# EAGLE board vfbga48breakout (EAGLE 4.15)
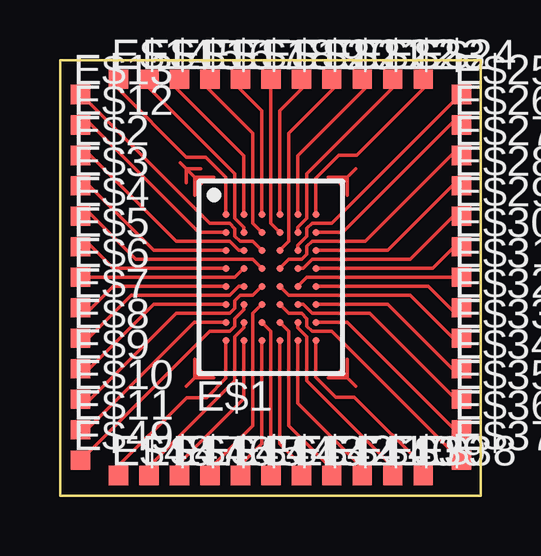
[diagram p0: board, top side]

Size 17.53 x 18.16 mm. Coordinates in mm from the lower left corner, seen from the top.
Outline: 0,0 0,18.16 17.53,18.16 17.53,0 0,0
Copper layers (1*16): Top 0.035mm / dielectric 1.5mm / Bottom 0.035mm
Design rules "default": minimum track width 10mil, minimum drill 24mil, track to track 6mil, track to pad 6mil, pad to pad 6mil, via to via 8mil, smd to smd 6mil, copper to edge 40mil, drill to drill 8mil, minimum pad ring 10mil, minimum via ring 8mil, stop-mask expansion 3mil, vias tented up to drill 0mil, thermal gap 10mil

## Footprints (pad centres in the part's own frame; a part is rotated, then mirrored left to right if it is on the bottom)
VFBGA48-.29 = smd 0.292 x 0.292: A1 -1.875,2.625; A2 -1.125,2.625; A3 -0.375,2.625; A4 0.375,2.625; A5 1.125,2.625; A6 1.875,2.625; B1 -1.875,1.875; B2 -1.125,1.875; B3 -0.375,1.875; B4 0.375,1.875; B5 1.125,1.875; B6 1.875,1.875; C1 -1.875,1.125; C2 -1.125,1.125; C3 -0.375,1.125; C4 0.375,1.125; C5 1.125,1.125; C6 1.875,1.125; D1 -1.875,0.375; D2 -1.125,0.375; D3 -0.375,0.375; D4 0.375,0.375; D5 1.125,0.375; D6 1.875,0.375; E1 -1.875,-0.375; E2 -1.125,-0.375; E3 -0.375,-0.375; E4 0.375,-0.375; E5 1.125,-0.375; E6 1.875,-0.375; F1 -1.875,-1.125; F2 -1.125,-1.125; F3 -0.375,-1.125; F4 0.375,-1.125; F5 1.125,-1.125; F6 1.875,-1.125; G1 -1.875,-1.875; G2 -1.125,-1.875; G3 -0.375,-1.875; G4 0.375,-1.875; G5 1.125,-1.875; G6 1.875,-1.875; H1 -1.875,-2.625; H2 -1.125,-2.625; H3 -0.375,-2.625; H4 0.375,-2.625; H5 1.125,-2.625; H6 1.875,-2.625
TP08SQ = smd 0.8 x 0.8: TP 0,0

## Placement (x,y rotation side)
E$1  [VFBGA48-.29]  8.79,9.11 0 top
E$2  [TP08SQ]  0.85,14.19 0 top
E$3  [TP08SQ]  0.85,12.92 0 top
E$4  [TP08SQ]  0.85,11.65 0 top
E$5  [TP08SQ]  0.85,10.38 0 top
E$6  [TP08SQ]  0.85,9.11 0 top
E$7  [TP08SQ]  0.85,7.84 0 top
E$8  [TP08SQ]  0.85,6.57 0 top
E$9  [TP08SQ]  0.85,5.3 0 top
E$10  [TP08SQ]  0.85,4.03 0 top
E$11  [TP08SQ]  0.85,2.76 0 top
E$12  [TP08SQ]  0.85,15.46 0 top
E$13  [TP08SQ]  0.85,16.73 0 top
E$14  [TP08SQ]  2.44,17.36 0 top
E$15  [TP08SQ]  3.71,17.36 0 top
E$16  [TP08SQ]  4.98,17.36 0 top
E$17  [TP08SQ]  6.25,17.36 0 top
E$18  [TP08SQ]  7.52,17.36 0 top
E$19  [TP08SQ]  8.79,17.36 0 top
E$20  [TP08SQ]  10.06,17.36 0 top
E$21  [TP08SQ]  11.33,17.36 0 top
E$22  [TP08SQ]  12.6,17.36 0 top
E$23  [TP08SQ]  13.87,17.36 0 top
E$24  [TP08SQ]  15.14,17.36 0 top
E$25  [TP08SQ]  16.73,16.73 0 top
E$26  [TP08SQ]  16.73,15.46 0 top
E$27  [TP08SQ]  16.73,14.19 0 top
E$28  [TP08SQ]  16.73,12.92 0 top
E$29  [TP08SQ]  16.73,11.65 0 top
E$30  [TP08SQ]  16.73,10.38 0 top
E$31  [TP08SQ]  16.73,9.11 0 top
E$32  [TP08SQ]  16.73,7.84 0 top
E$33  [TP08SQ]  16.73,6.57 0 top
E$34  [TP08SQ]  16.73,5.3 0 top
E$35  [TP08SQ]  16.73,4.03 0 top
E$36  [TP08SQ]  16.73,2.76 0 top
E$37  [TP08SQ]  16.73,1.49 0 top
E$38  [TP08SQ]  15.14,0.85 0 top
E$39  [TP08SQ]  13.87,0.85 0 top
E$40  [TP08SQ]  12.6,0.85 0 top
E$41  [TP08SQ]  11.33,0.85 0 top
E$42  [TP08SQ]  10.06,0.85 0 top
E$43  [TP08SQ]  8.79,0.85 0 top
E$44  [TP08SQ]  7.52,0.85 0 top
E$45  [TP08SQ]  6.25,0.85 0 top
E$46  [TP08SQ]  4.98,0.85 0 top
E$47  [TP08SQ]  3.71,0.85 0 top
E$48  [TP08SQ]  2.44,0.85 0 top
E$49  [TP08SQ]  0.85,1.49 0 top

## Library data of the parts
E$1 = psram-micron
E$2-E$49 = testpad

## Nets
S$1: E$1.C3
S$2: E$1.C2
S$3: E$1.D3
S$4: E$1.D2
S$5: E$1.A2
S$6: E$1.E2
S$7: E$1.F1
S$8: E$1.E3
S$9: E$1.F2
S$10: E$1.G2
S$11: E$1.F3
S$12: E$1.G3
S$13: E$1.G4
S$14: E$1.H5
S$15: E$1.G5
S$16: E$1.H6
S$17: E$1.F4
S$18: E$1.G6
S$19: E$1.F5
S$20: E$1.E4
S$22: E$1.E5
S$23: E$1.E6
S$24: E$1.D6
S$25: E$1.D5
S$26: E$1.D4
S$27: E$1.B6
S$28: E$1.A6
S$29: E$1.C5
S$30: E$1.H4
S$31: E$1.H3
S$32: E$1.H2
S$33: E$1.H1
S$34: E$1.G1
S$35: E$1.E1
S$36: E$1.D1
S$37: E$1.C1
S$38: E$1.B1
S$39: E$1.A1
S$40: E$1.B2
S$41: E$1.B3
S$42: E$1.A3
S$43: E$1.B4
S$44: E$1.A4
S$45: E$1.C4
S$46: E$1.A5
S$47: E$1.B5
S$48: E$1.C6
S$49: E$1.F6

## Tracks (layer width: path | path; a pad name or v marks a point on that pad's centre or on a via)
S$1
  Top 0.152: E$1.C3 8.04,10.61 7.51,10.61 7.29,10.83 7.29,11.14 7.07,11.36 6.25,11.36 1,16.61 0.91,16.61
S$2
  Top 0.152: E$1.C2 7.45,10.23 7.08,10.61 4.85,10.61 1.1,14.36
S$3
  Top 0.152: E$1.D3 8.04,9.86 3.16,9.86 1.1,11.92
S$4
  Top 0.152: E$1.D2 7.29,9.11 1.1,9.11
S$5
  Top 0.152: E$1.A2 7.66,14.17 4.85,16.98
S$6
  Top 0.152: E$1.E2 7.45,8.73 7.08,8.36 2.98,8.36 1.1,6.48
S$7
  Top 0.152: E$1.F1 3.91,7.98 1.1,5.17
S$8
  Top 0.152: E$1.E3 8.04,8.36 7.51,8.36 7.29,8.14 7.29,7.82 7.08,7.61 4.85,7.61 1.1,3.86
S$9
  Top 0.152: E$1.F2 7.66,7.76 7.29,7.39 7.29,7.07 7.08,6.86 6.23,6.86 0.61,1.23
S$10
  Top 0.152: E$1.G2 7.66,7.01 7.29,6.64 7.29,4.79 3.54,1.04
S$11
  Top 0.152: E$1.F3 8.04,7.61 8.04,2.92 6.16,1.04
S$12
  Top 0.152: E$1.G3 8.79,6.86 8.79,1.04
S$13
  Top 0.152: E$1.G4 9.54,6.86 9.54,2.92 11.41,1.04
S$14
  Top 0.152: E$1.H5 9.91,3.86 12.73,1.04
S$15
  Top 0.152: E$1.G5 9.91,7.01 10.29,6.64 10.29,4.79 14.04,1.04
S$16
  Top 0.152: E$1.H6 10.66,4.94 11.5,4.11 12.27,4.11 15.35,1.04
S$17
  Top 0.152: E$1.F4 9.54,7.61 10.07,7.61 10.29,7.39 10.29,7.07 10.5,6.86 11.32,6.86 16.75,1.42
S$18
  Top 0.152: E$1.G6 11.98,7.23 16.66,2.54
S$19
  Top 0.152: E$1.F5 10.13,7.98 10.5,7.61 12.91,7.61 16.66,3.86
S$20
  Top 0.152: E$1.E4 9.54,8.36 14.6,8.36 16.48,6.48
S$21
  Top 0.152: 1.07,1.45 0.86,1.45
S$22
  Top 0.152: E$1.E5 10.29,9.11 16.48,9.11
S$23
  Top 0.152: E$1.E6 15.35,8.73 16.48,7.61
S$24
  Top 0.152: E$1.D6 15.54,9.48 16.48,10.42
S$25
  Top 0.152: E$1.D5 10.13,9.48 10.51,9.86 14.6,9.86 16.48,11.73
S$26
  Top 0.152: E$1.D4 9.54,9.86 10.08,9.86 10.29,10.07 10.29,10.39 10.5,10.61 12.73,10.61 16.48,14.36
S$27
  Top 0.152: E$1.B6 11.79,10.98 16.48,15.67
S$28
  Top 0.152: E$1.A6 10.66,13.24 11.61,14.19 12.37,14.19 15.16,16.98
S$29
  Top 0.152: E$1.C5 9.91,10.45 10.29,10.83 10.29,11.14 10.5,11.36 11.33,11.36 16.74,16.77
S$30
  Top 0.152: E$1.H4 9.16,2.17 10.29,1.04
S$31
  Top 0.152: E$1.H3 8.41,2.17 7.29,1.04
S$32
  Top 0.152: E$1.H2 7.66,4.04 4.85,1.23
S$33
  Top 0.152: E$1.H1 6.91,4.89 6.1,4.08 5.28,4.08 2.23,1.04
S$34
  Top 0.152: E$1.G1 5.6,7.23 0.91,2.54
S$35
  Top 0.152: E$1.E1 2.23,8.73 1.1,7.61
S$36
  Top 0.152: E$1.D1 2.23,9.48 1.1,10.61
S$37
  Top 0.152: E$1.C1 3.91,10.23 1.1,13.04
S$38
  Top 0.152: E$1.B1 5.79,10.98 1.1,15.67
S$39
  Top 0.152: E$1.A1 6.91,13.27 6.06,14.12 5.26,14.12 2.41,16.98
S$40
  Top 0.152: E$1.B2 7.66,11.19 7.29,11.57 7.29,13.42 3.54,17.17
S$41
  Top 0.152: E$1.B3 8.04,11.36 8.04,15.11 6.16,16.98
S$42
  Top 0.152: E$1.A3 8.41,16.04 7.29,17.17
S$43
  Top 0.152: E$1.B4 8.79,11.36 8.79,17.17
S$44
  Top 0.152: E$1.A4 9.16,16.04 10.29,17.17
S$45
  Top 0.152: E$1.C4 9.54,10.61 9.54,15.11 11.41,16.98
S$46
  Top 0.152: E$1.A5 9.91,14.17 12.73,16.98
S$47
  Top 0.152: E$1.B5 9.91,11.2 10.29,11.58 10.29,13.42 13.85,16.98
S$48
  Top 0.152: E$1.C6 13.66,10.23 16.48,13.04
S$49
  Top 0.152: E$1.F6 13.66,7.98 16.48,5.17
S$50
  Top 0.152: 0.86,16.74 1.07,16.74
S$51
  Top 0.152: 5.61,12.52 5.61,13.28 6.4,13.28 | 5.87,13.63 5.26,13.63 5.26,13.05
S$52
  Top 0.152: 5.89,13 5.64,13.25 | 5.64,13.25 5.26,13.63 | 5.64,13.25 5.26,13.63 | 5.26,13.63 5,13.89
S$53
  Top 0.152: 11.96,5.68 11.96,4.92 11.18,4.92
S$54
  Top 0.152: 11.68,5.2 12.32,4.57
S$55
  Top 0.152: 11.96,12.52 11.96,13.28 11.18,13.28
S$56
  Top 0.152: 11.68,13 12.32,13.63
S$57
  Top 0.152: 5.61,5.68 5.61,4.92 6.4,4.92
S$58
  Top 0.152: 16.71,16.79 16.51,16.79
S$59
  Top 0.152: 5.89,5.2 5.26,4.57
S$64
  Top 0.152: 16.71,1.5 16.51,1.5